# Altium PCB Test.PcbDoc
Units mil, origin at the board's own origin, x right, y up, seen from the top; angles counter-clockwise.
Board outline 6000 x 4000 mil, 2 copper layers (Top Layer, Bottom Layer); 12 components, 11 nets, 32 pads, 0 vias.
Unrouted connection lines stored in the file: 18.
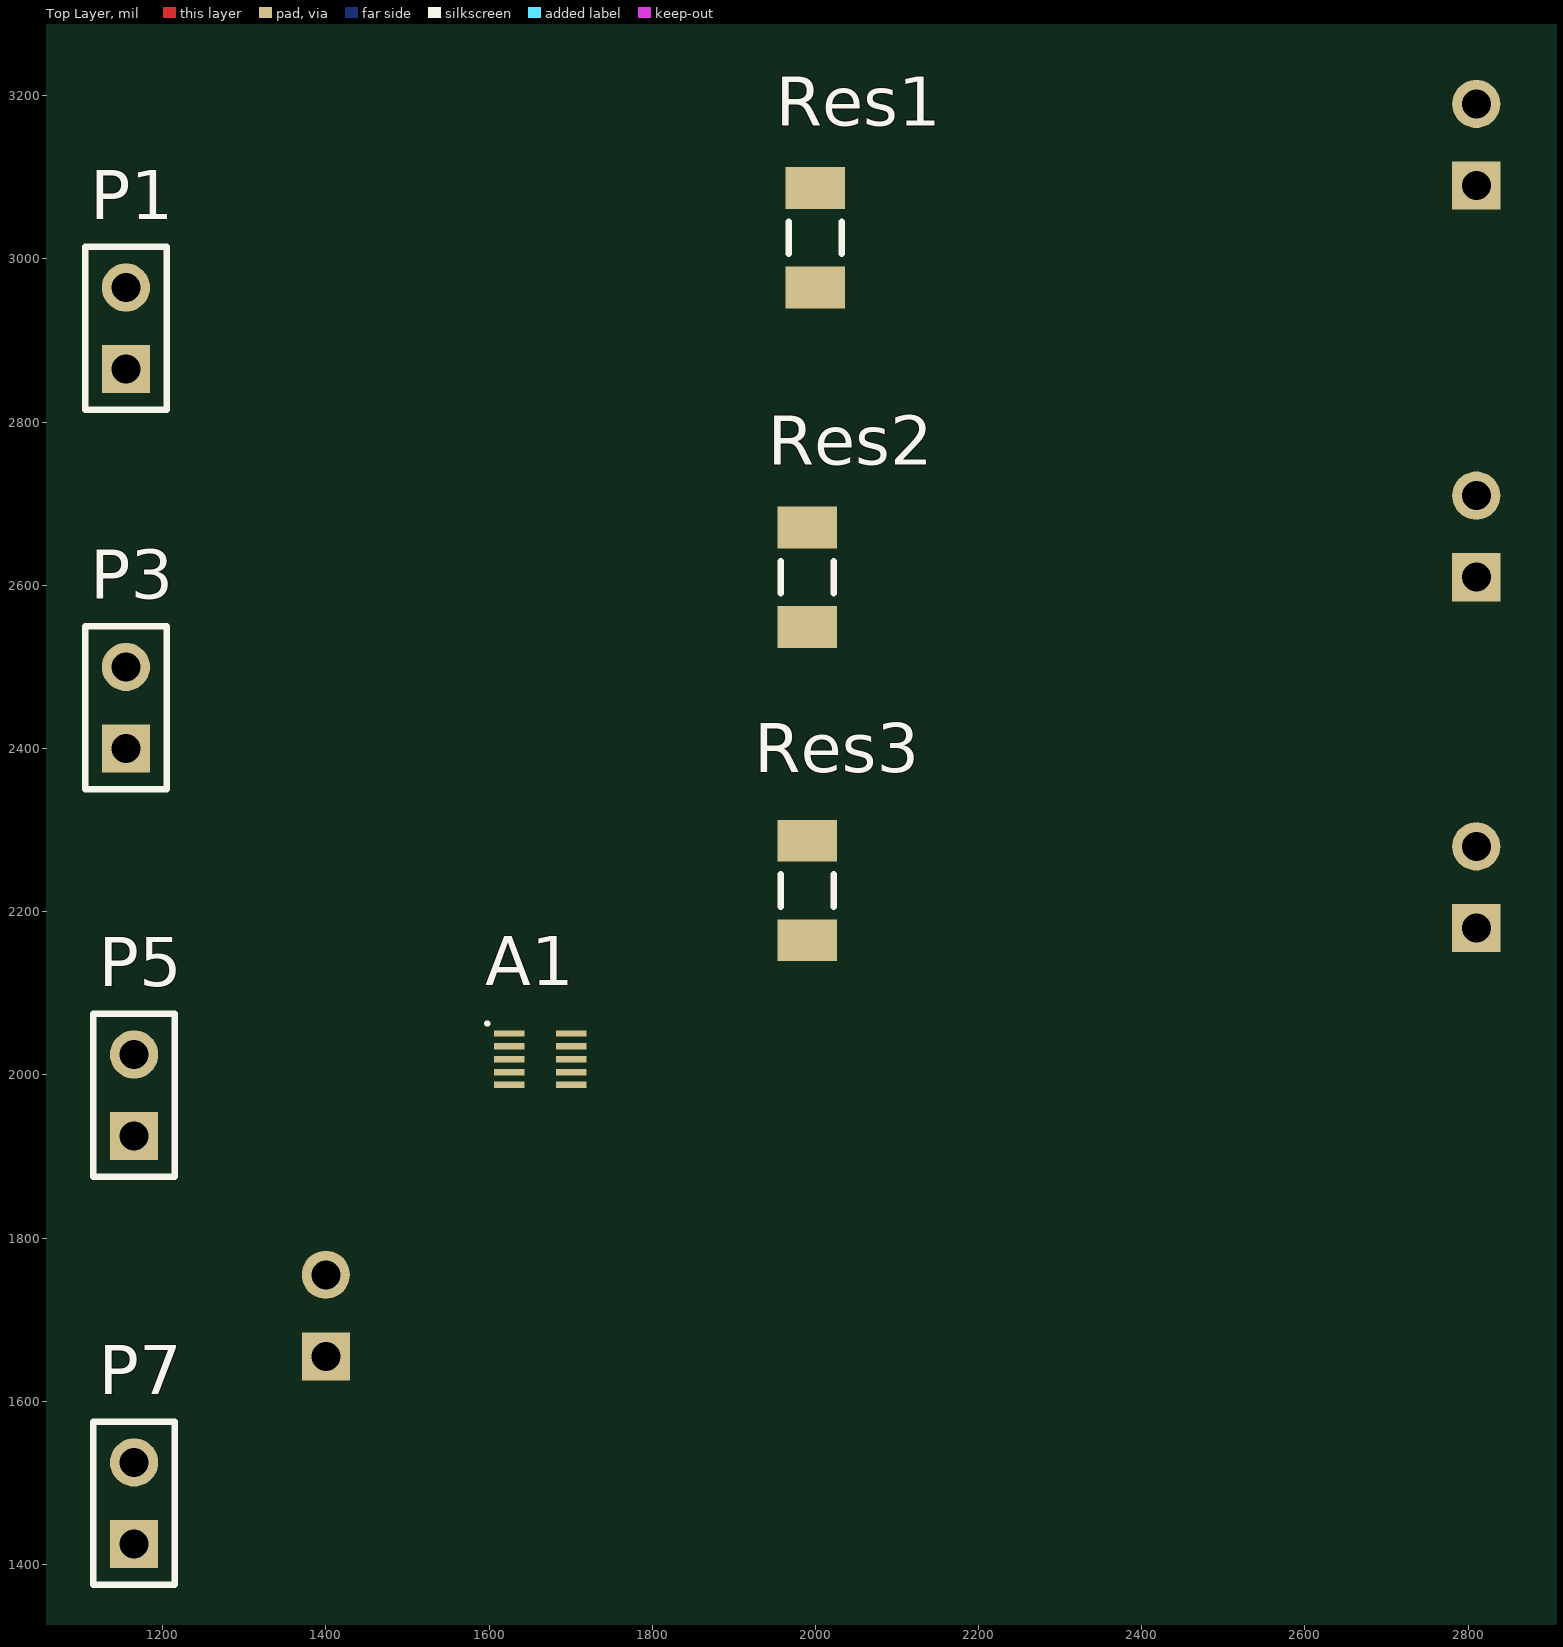
[diagram p0: Top Layer view]
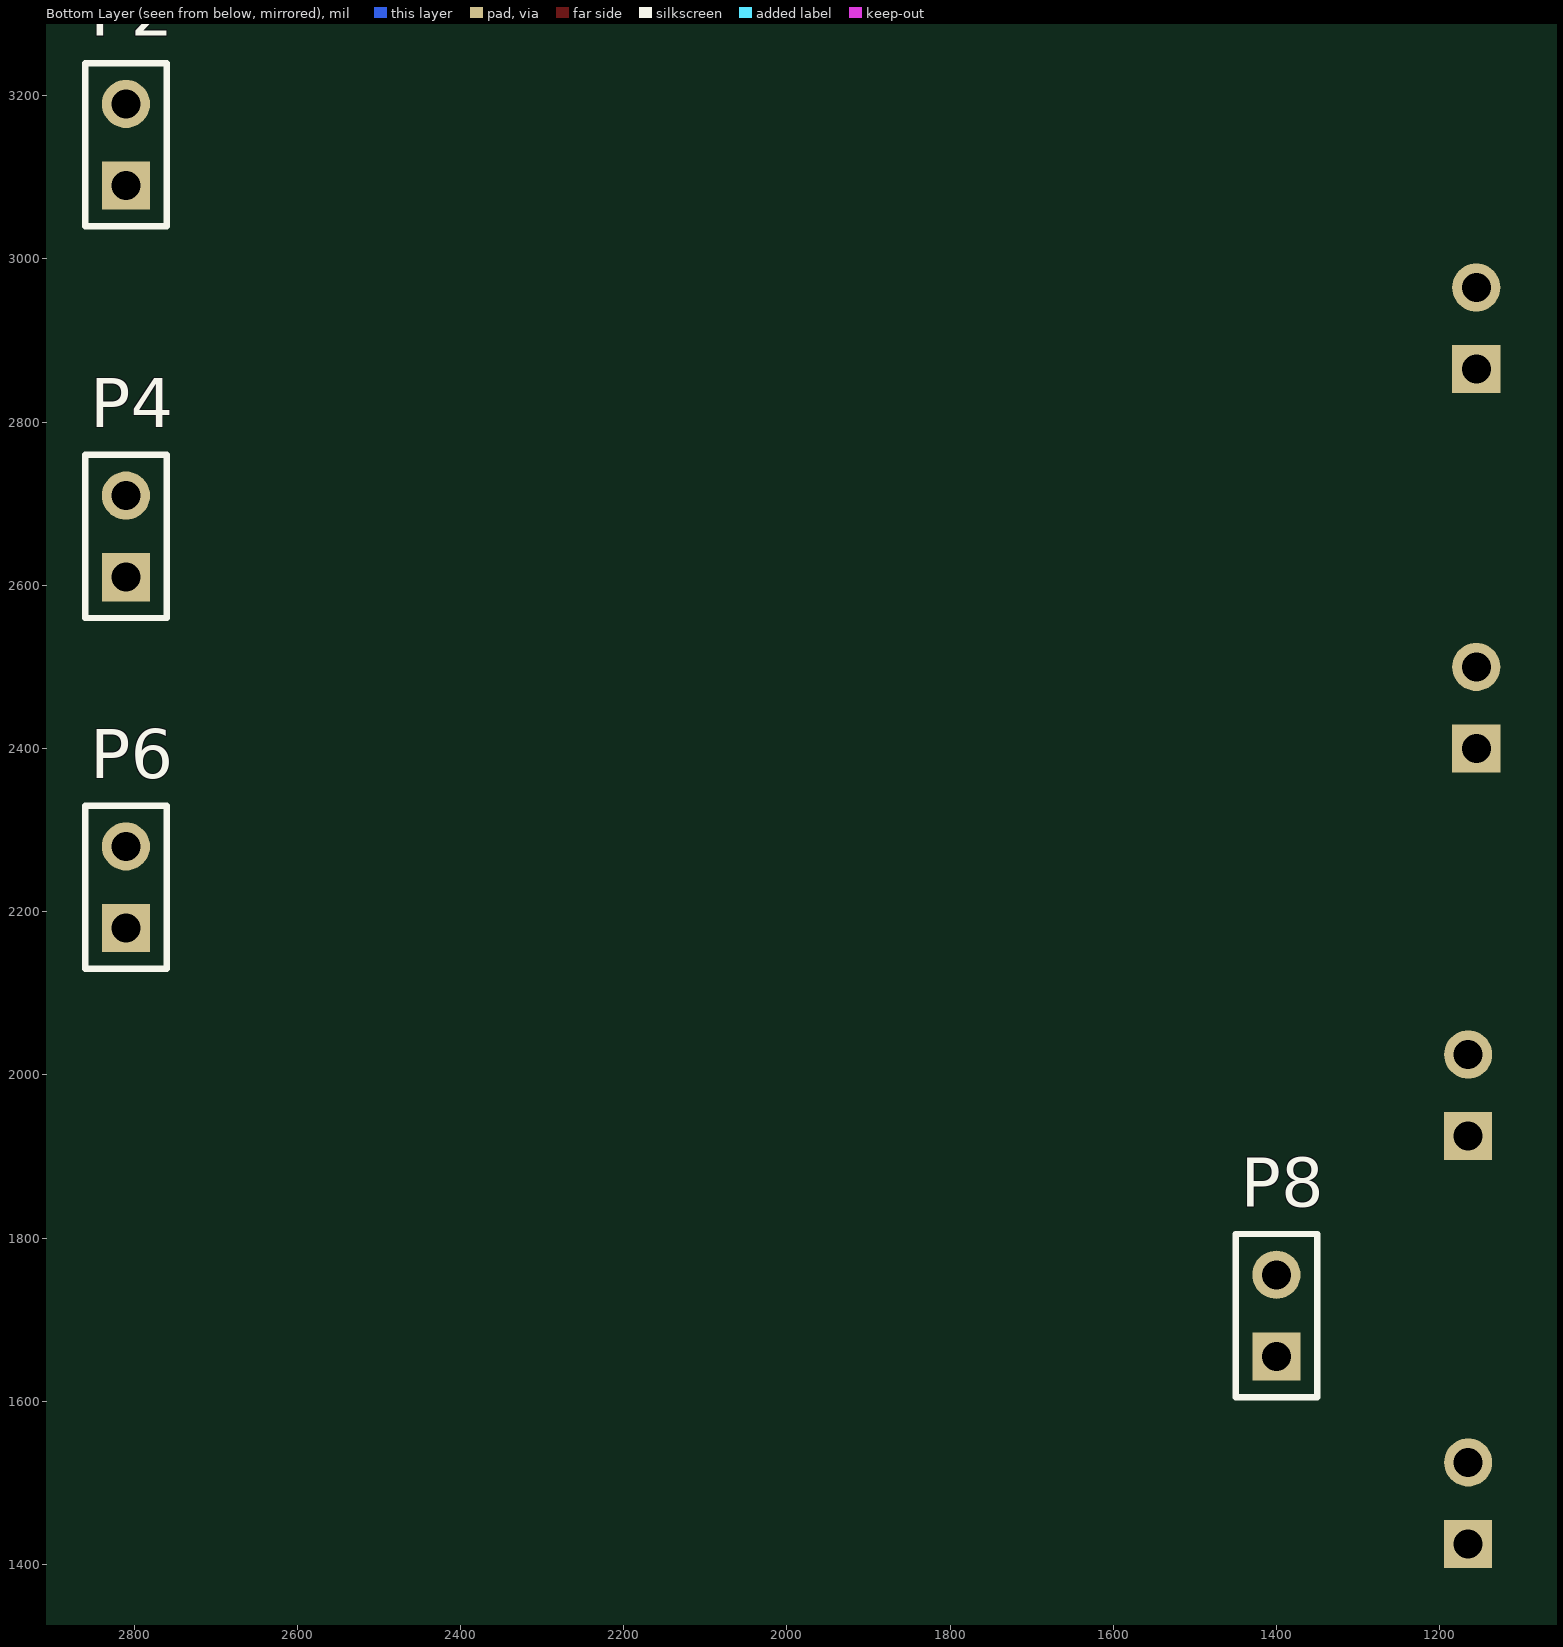
[diagram p1: Bottom Layer view, seen from below]

## Layer stack, top to bottom
Top Solder: solder mask 0.4, Solder Resist, Dk 3.5
Top Layer: signal copper 1.4
Dielectric 1: dielectric 12.6, FR-4, Dk 4.8
Bottom Layer: signal copper 1.4
Bottom Solder: solder mask 0.4, Solder Resist, Dk 3.5

## Board outline
1000,1000 7000,1000 7000,5000 1000,5000

## Design rules (kind name [scope] priority, off if disabled: settings)
Clearance [All] p1: gap=10 ignorepadtopadclearanceinfootprint=FALSE except(0: Arc-Hole Track-Hole SMDPad-Hole THPad-Hole Via-Hole Fill-Hole Poly-Hole Region-Hole Text-Hole)
PolygonConnect [All] p1: connectstyle=Relief reliefconductorwidth=16 reliefentries=4 polygonreliefangle="90 Angle" airgapwidth=16
RoomDefinition Proto [InComponentClass('Proto')] p1: confinementstyle=ConfineIn formatcopy=TRUE lockcomponents=FALSE outline 7280,1423.98 9650,1423.98 9650,1753.98 7280,1753.98
RoutingVias [All] p1: holewidth=24 width=76 viastyle="Through Hole" minholewidth=24 minwidth=76 maxholewidth=24 maxwidth=76
SolderMaskExpansion [All] p1: expansion=4
Width [All] p1: maxlimit=254 minlimit=12 preferedwidth=16 minimp=50.000000 maximp=50.000000 favimp=50.000000
30 further rules are at their usual default settings.

## Components (designator, comment, footprint, x,y, rotation, side; value= is the part's Value field where it differs from the comment)
A1 "ACCELERO" SON40P200X100-10M 1662.99,2019.25 r0 top
P1 "VCC / GND" HDR1X2 1155,2865 r90 top
P2 "LED1" HDR1X2 2810,3090 r90 bottom
P3 "GPIO 1/2" HDR1X2 1155,2400 r90 top
P4 "LED2" HDR1X2 2810,2610 r90 bottom
P5 "GPIO 3/4" HDR1X2 1165,1925 r90 top
P6 "LED3" HDR1X2 2810,2180 r90 bottom
P7 "GPIO 5/6" HDR1X2 1165,1425 r90 top
P8 "BUZZER" HDR1X2 1400,1655 r90 bottom
Res1 "Resistor 330" RESC3116X06M 2000,3026.02 r90 top
Res2 "Resistor 330" RESC3116X06M 1990,2610 r90 top
Res3 "Resistor 330" RESC3116X06M 1990,2226.02 r90 top

## Footprints (in the part's own frame and the unit in brackets; to place one, negate y for a bottom-side part, rotate by r counter-clockwise, add the part's x,y. Pads: shape width x height; smd on the part's side, far side on the other; paste and mask are expansions set on the pad)
HDR1X2 [mm] "Connector; Header; 2 Position"
  rect 1.5x1.5 hole 0.9: 1(0,0)
  round 1.5 hole 0.9: 2(2.54,0)
  silkscreen extent -1.27,-1.27 3.81,1.27
RESC3116X06M [mm] "Chip Resistor, 2-Leads, Body 3,15x1,60mm, IPC Low Density"
  rect 1.3x1.85 smd: 1(-1.55,0) 2(1.55,0)
  silkscreen extent -0.5,-0.82 0.5,0.82, body extent -1.65,-0.87 1.65,0.87, height 0.6
SON40P200X100-10M [mm] "SON, 10-Leads, Body 2,00x2,00mm, Pitch 0,40mm, IPC Low Density"
  rect 0.95x0.2 smd: 1(-0.965,0.8) 2(-0.965,0.4) 3(-0.965,0) 4(-0.965,-0.4) 5(-0.965,-0.8) 6(0.965,-0.8) 7(0.965,-0.4) 8(0.965,0) 9(0.965,0.4) 10(0.965,0.8)
  silkscreen extent -1.7,1.06 -1.6,1.16, body extent -1,-1 1,1, height 1

## Part data
A1: library part MMA8653FCR1, "Accéléromètres 3-axis 2g/4g/8g 10 bit", Manufacturer="NXP / Freescale", Supplier Part Number=841-MMA8653FCR1, Manufacturer Part Member=MMA8653FCR1, Published=15/02/2017, Publisher="François Lefevre", Supplier=Mouser
P1 P2 P3 P4 P5 P6 P7 P8: library part "Header 2", "Header, 2-Pin", LatestRevisionDate=17-Jul-2002, LatestRevisionNote="Re-released for DXP Platform.", Publisher="Altium Limited"
Res1 Res2 Res3: library part CRCW1206330RFKEA, "Résistance CMS 330 Ohms  250 mW  size 1206 taille 3.2x1.6 mm série CRCW", Manufacturer=Mouser, Power="250 mW", Resistance="330 Ohms", Supplier Part Number=71-CRCW1206-330-E3, Temp./coefficient="100 ppm/K", Tolerance=1%, Manufacturer Part Number=CRCW1206330RFKEA, Published=16/02/2017, Publisher="François Lefevre", Supplier=Mouser

## Nets (pads, with @x,y where several pads share a name; then routed paths per layer and width w, separated by ;. In a path a pad name is that pad's centre, name@x,y a point inside that pad or via, vN(x,y) a via of type N, cw(c..) or ccw(c..) an arc to the next point about the centre after c; other vN are vias at no path point)
NetA1_1: A1.1 P1.2 Res1.1
NetA1_2: A1.2 P5.2
NetA1_3: A1.3 P7.1
NetA1_6: A1.6 A1.7 A1.9 P1.1 P2.2 P4.2 P6.2 P8.2
NetA1_10: A1.10 P5.1
NetP2_1: P2.1 Res1.2
NetP3_1: P3.1 Res2.1
NetP3_2: P3.2 Res3.1
NetP4_1: P4.1 Res2.2
NetP6_1: P6.1 Res3.2
NetP7_2: P7.2 P8.1
pads on no net: A1.4 A1.5 A1.8